# Altium PCB PCB1.PcbDoc (part 2 of 2)
Units mil, origin at the board's own origin, x right, y up, seen from the top; angles counter-clockwise.
Board outline 6000 x 4000 mil, 10 copper layers (Top Layer, Internal Plane 1, Internal Plane 5, Layer 2, Internal Plane 3, Internal Plane 4, Layer 4, Internal Plane 6, Internal Plane 2, Bottom Layer), stack 97.956 mil thick; 84 components, 218 nets, 925 pads, 573 vias.
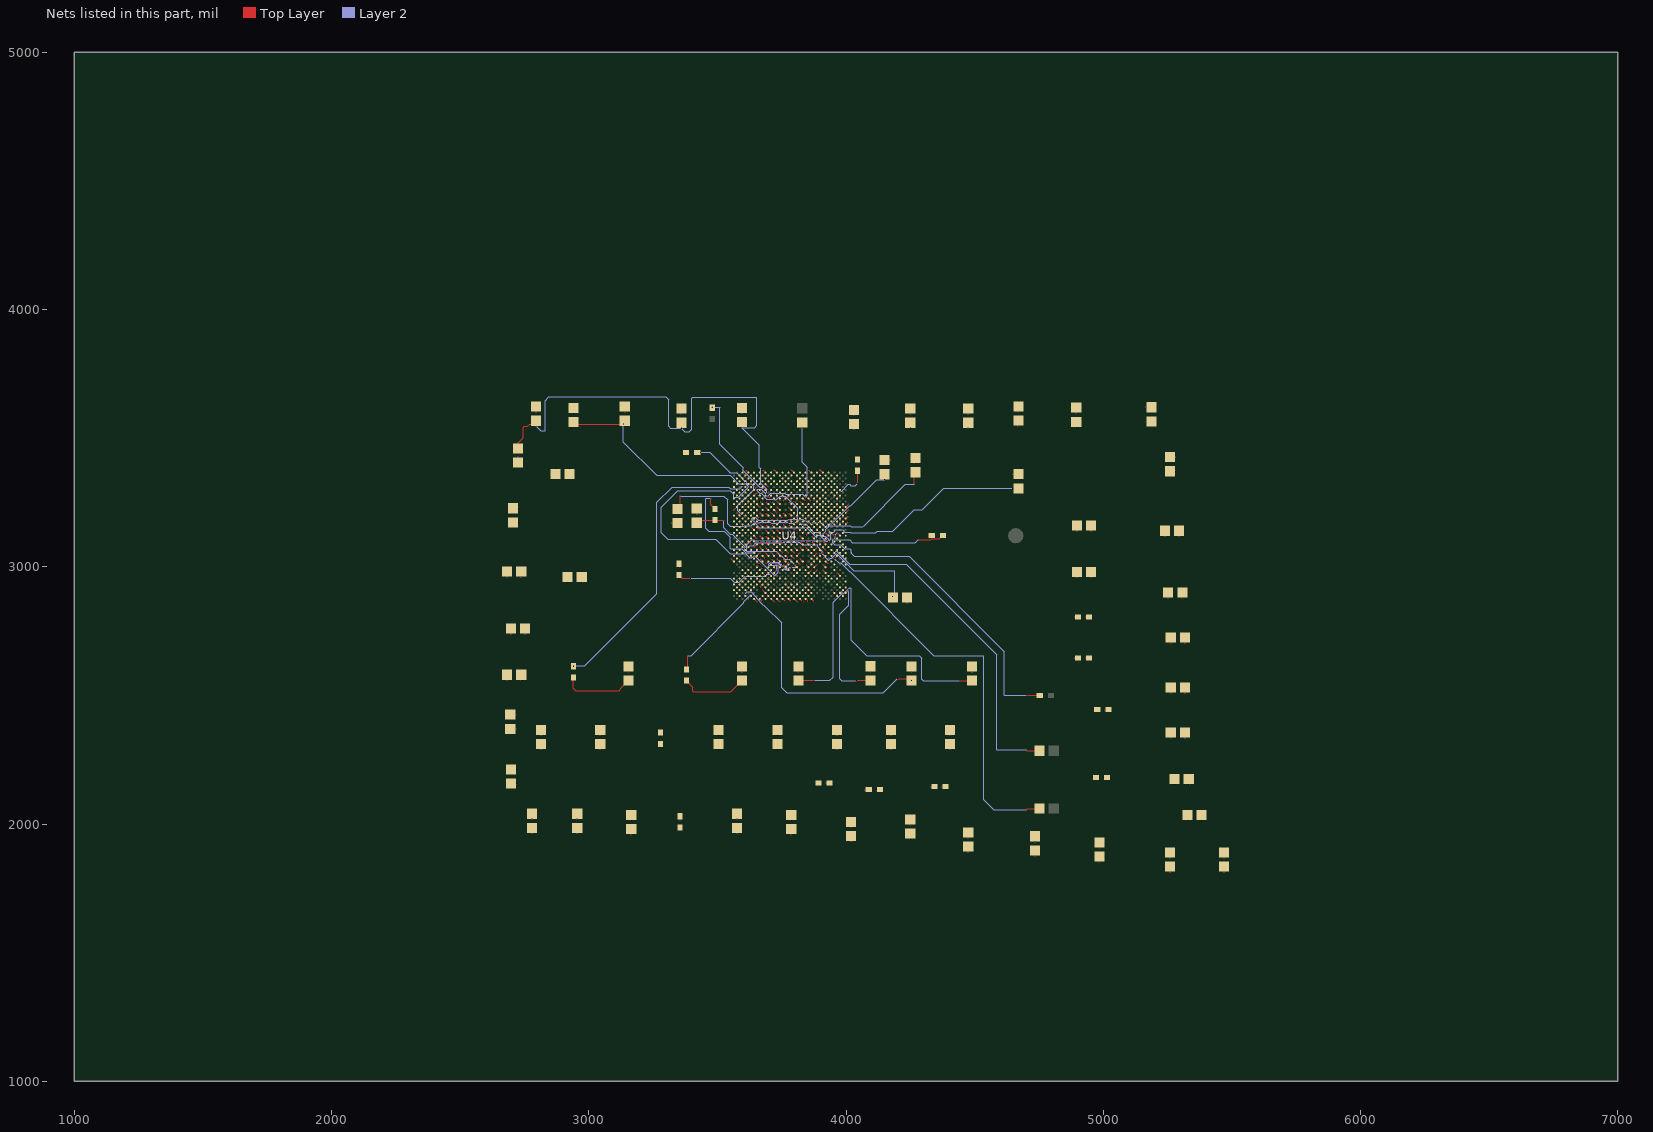
[diagram p9: the nets of this part, all layers, seen from the top]

## Via types
v1: diameter 2, hole 1, Top Layer to Bottom Layer, 573 vias

## Nets (pads, with @x,y where several pads share a name; then routed paths per layer and width w, separated by ;. In a path a pad name is that pad's centre, name@x,y a point inside that pad or via, vN(x,y) a via of type N, cw(c..) or ccw(c..) an arc to the next point about the centre after c; other vN are vias at no path point) (continued)
GND: C18.1 C19.1 C20.1 C21.1 C22.1 C23.1 C24.1 C25.1 C26.1 C27.1 C28.1 C29.1 C30.1 C31.1 C32.1 C33.1 C34.1 C35.1 C36.1 C37.1 C38.1 C39.1 C40.1 C41.1 C42.1 C43.1 C44.1 C45.1 C46.1 C47.1 C48.1 C49.1 C50.2 C51.1 C52.1 C53.1 C54.1 C55.1 C56.1 C57.1 C58.1 C59.1 C60.1 C61.1 C62.1 C63.1 C64.1 C65.1 C66.2 C67.1 C68.2 C69.2 C70.2 C71.2 C72.2 C73.2 C74.2 C75.1 C76.2 C77.2 C78.2 C79.2 R29.1 U4.A6 U4.A12 U4.A16 U4.A22 U4.A28 U4.A32 U4.AA4 U4.AA8 U4.AA24 U4.AA26 U4.AA28 U4.AA30 U4.AB13 U4.AB15 U4.AB17 U4.AB21 U4.AC4 U4.AC30 U4.AD7 U4.AD19 U4.AD21 U4.AE16 U4.AE20 U4.AF5 U4.AF9 U4.AF11 U4.AF13 U4.AF15 U4.AF17 U4.AF19 U4.AF21 U4.AF23 U4.AF25 U4.AF27 U4.AF29 U4.AG18 U4.AG20 U4.AH7 U4.AH9 U4.AH31 U4.AJ2 U4.AJ4 U4.AJ34 U4.AK7 U4.AK11 U4.AK13 U4.AK15 U4.AK17 U4.AK19 U4.AK21 U4.AK23 U4.AK29 U4.AK31 U4.AK33 U4.AL8 U4.AL30 U4.AM1 U4.AM3 U4.AM13 U4.AM15 U4.AM21 U4.AM23 U4.AM25 U4.AM29 U4.AM31 U4.AM33 U4.AN20 U4.AP9 U4.AR4 U4.AR6 U4.AR22 U4.AR24 U4.AR26 U4.AT13 U4.AT23 U4.AT27 U4.AT29 U4.AU6 U4.AU12 U4.AU22 U4.AU26 U4.AU28 U4.AU38 U4.AV5 U4.AV9 U4.AV11 U4.AV13 U4.AV15 U4.AV17 U4.AV19 U4.AV33 U4.AW2 U4.AW4 U4.AW10 U4.AW12 U4.AW14 U4.AW34 U4.AY11 U4.AY13 U4.AY19 U4.AY21 U4.AY23 U4.AY27 U4.B5 U4.BA8 U4.BA12 U4.BA18 U4.BA20 U4.BA22 U4.BA26 U4.BA28 U4.BB7 U4.BB15 U4.BB17 U4.BB19 U4.BB21 U4.BB23 U4.BB25 U4.BB27 U4.BC12 U4.BC16 U4.BC18 U4.BC20 U4.BC22 U4.BC24 U4.BC26 U4.BC28 U4.BC36 U4.BD13 U4.BD15 U4.BD17 U4.BD19 U4.BD21 U4.BD23 U4.BD25 U4.BD27 U4.BD37 U4.BE8 U4.BE10 U4.BE14 U4.BE16 U4.BE18 U4.BE20 U4.BE22 U4.BE24 U4.BE26 U4.BE28 U4.C8 U4.C18 U4.C20 U4.C32 U4.D5 U4.D7 U4.D27 U4.E12 U4.F7 U4.F19 U4.F25 U4.F27 U4.F29 U4.F37 U4.G8 U4.G10 U4.G12 U4.G14 U4.G16 U4.G18 U4.G20 U4.G24 U4.G28 U4.G30 U4.G32 U4.H35 U4.H37 U4.J16 U4.J18 U4.J32 U4.J36 U4.J38 U4.K5 U4.K9 U4.K17 U4.K21 U4.K37 U4.L4 U4.L6 U4.L8 U4.L30 U4.L32 U4.M5 U4.M7 U4.M35 U4.M37 U4.M39 U4.N2 U4.N4 U4.N8 U4.N22 U4.N24 U4.N26 U4.N28 U4.N30 U4.N32 U4.N34 U4.N36 U4.N38 U4.N40 U4.P5 U4.P9 U4.P11 U4.P13 U4.P15 U4.P17 U4.P21 U4.P35 U4.P37 U4.P39 U4.R8 U4.R22 U4.R24 U4.R26 U4.R28 U4.R30 U4.R32 U4.R34 U4.R36 U4.R38 U4.R40 U4.T3 U4.T5 U4.T17 U4.T19 U4.T35 U4.T37 U4.T39 U4.U26 U4.U28 U4.U30 U4.U32 U4.U34 U4.U36 U4.U38 U4.U40 U4.V3 U4.V11 U4.V13 U4.V15 U4.V17 U4.V19 U4.V21 U4.V23 U4.V35 U4.V37 U4.V39 U4.W4 U4.W16 U4.W22 U4.W26 U4.W28 U4.W30 U4.W32 U4.W34 U4.W36 U4.W38 U4.W40 U4.Y3 U4.Y23 | length 3581.7
  Top Layer w2: v1(2682.44,2558.31) 2682.44,2559.11 C44.1@2682.44,2580 ; v1(2682.44,2960.12) 2682.44,2960.91 C42.1@2682.44,2981.81 ; C45.1@2695,2369.88 2715.89,2369.88 v1(2716.69,2369.88) ; C46.1@2697.44,2157.44 2718.33,2157.44 v1(2719.13,2157.44) ; v1(2697.44,2738.31) 2697.44,2739.11 C43.1@2697.44,2760 ; C41.1@2705,3172.44 2725.89,3172.44 v1(2726.69,3172.44) ; C78.2@2725,3404.88 v1(2725,3426.57) ; v1(2780,1963.19) C47.1@2780,1984.88 ; v1(2795,3600.87) C79.2@2795,3622.56 ; v1(2814.41,2344.22) C37.1@2814.41,2365.91 ; C40.1@2925.12,3360 2925.12,3380.89 v1(2925.12,3381.69) ; v1(2940,3595.87) C74.2@2940,3617.56 ; v1(2955,1963.19) C48.1@2955,1984.88 ; v1(2972.56,2938.31) C65.1@2972.56,2960 ; v1(3044.41,2344.22) C36.1@3044.41,2365.91 ; v1(3140,3600.87) C75.1@3140,3622.56 ; v1(3165,1958.19) C49.1@3165,1979.88 ; v1(3279.41,2341.19) C35.1@3279.41,2355 ; v1(3323.31,3169.88) C64.1@3345,3169.88 ; v1(3350,2997.84) R29.1@3350,3011.65 ; v1(3360,3593.43) C76.2@3360,3615.12 ; v1(3420,3204.51) C70.2@3420,3226.19 ; v1(3504.41,2344.22) C34.1@3504.41,2365.91 ; v1(3553.31,3031.58) U4.AM1@3564.45,3020.44 ; v1(3564.45,3220.99) U4.N2@3575.59,3232.13 ; v1(3575.59,2018.32) C39.1@3575.59,2040 ; U4.AW2@3575.59,2942.44 v1(3575.59,2948.38) ; U4.AJ2@3575.59,3053.86 v1(3575.59,3059.8) ; v1(3575.59,3209.84) U4.T3@3586.73,3198.7 ; U4.AM3@3586.73,3020.44 v1(3586.73,3026.38) ; U4.Y3@3586.73,3154.14 v1(3586.73,3160.08) ; v1(3586.73,3170.48) U4.V3@3586.73,3176.42 ; v1(3595,3595.87) C77.2@3595,3617.56 ; U4.AW4@3597.87,2942.44 v1(3597.87,2948.38) ; U4.AR4@3597.87,2987.01 v1(3597.87,2992.95) ; U4.AJ4@3597.87,3053.86 v1(3597.87,3059.8) ; U4.AC4@3597.87,3120.71 v1(3597.87,3126.65) ; U4.AA4@3597.87,3143 v1(3597.87,3148.94) ; U4.W4@3597.87,3165.28 v1(3597.87,3171.22) ; v1(3597.87,3226.19) U4.N4@3597.87,3232.13 ; v1(3597.87,3248.47) U4.L4@3597.87,3254.41 ; U4.AV5@3609.01,2953.59 v1(3609.01,2959.53) ; U4.AF5@3609.01,3087.29 v1(3609.01,3093.23) ; v1(3609.01,3192.76) U4.T5@3609.01,3198.7 ; v1(3609.01,3215.05) U4.P5@3609.01,3220.99 ; v1(3609.01,3237.33) U4.M5@3609.01,3243.27 ; v1(3609.01,3259.62) U4.K5@3609.01,3265.56 ; v1(3609.01,3326.47) U4.D5@3609.01,3332.41 ; v1(3609.01,3348.75) U4.B5@3609.01,3354.69 ; v1(3609.02,3376.97) U4.A6@3620.16,3365.83 ; U4.AU6@3620.16,2964.73 v1(3620.16,2970.67) ; U4.AR6@3620.16,2987.01 v1(3620.16,2992.95) ; v1(3620.16,3248.47) U4.L6@3620.16,3254.41 ; U4.BB7@3631.3,2909.02 v1(3631.3,2914.96) ; U4.AK7@3631.3,3042.72 v1(3631.3,3048.66) ; U4.AH7@3631.3,3065 v1(3631.3,3070.94) ; U4.AD7@3631.3,3109.57 v1(3631.3,3115.51) ; v1(3631.3,3154.14) U4.AA8@3642.44,3143 ; v1(3631.3,3237.33) U4.M7@3631.3,3243.27 ; v1(3631.3,3304.18) U4.F7@3631.3,3310.12 ; v1(3631.3,3326.47) U4.D7@3631.3,3332.41 ; U4.BE8@3642.44,2875.59 v1(3653.58,2864.45) ; U4.BA8@3642.44,2920.16 v1(3642.44,2926.1) ; U4.AL8@3642.44,3031.58 v1(3642.44,3037.52) ; v1(3642.44,3076.15) U4.AF9@3653.58,3087.29 ; v1(3642.44,3203.91) U4.R8@3642.44,3209.85 ; v1(3642.44,3226.19) U4.N8@3642.44,3232.13 ; v1(3642.44,3248.47) U4.L8@3642.44,3254.41 ; U4.G8@3642.44,3298.98 v1(3653.58,3310.12) ; v1(3642.44,3337.61) U4.C8@3642.44,3343.55 ; U4.AV9@3653.58,2953.59 v1(3653.58,2959.53) ; U4.AP9@3653.58,2998.15 v1(3653.58,3004.09) ; U4.AH9@3653.58,3065 v1(3653.58,3070.94) ; v1(3653.58,3215.05) U4.P9@3653.58,3220.99 ; v1(3653.58,3259.62) U4.K9@3653.58,3265.56 ; U4.BE10@3664.72,2875.59 v1(3675.86,2864.45) ; v1(3664.72,2920.16) U4.AY11@3675.86,2931.3 ; U4.AW10@3664.72,2942.44 v1(3664.72,2948.38) ; v1(3664.72,3098.43) U4.AF11@3675.86,3087.29 ; v1(3664.72,3293.04) U4.G10@3664.72,3298.98 ; v1(3675.87,2909.02) U4.BC12@3687.01,2897.88 ; U4.AV11@3675.86,2953.59 v1(3675.86,2959.53) ; U4.AK11@3675.86,3042.72 v1(3687,3031.58) ; v1(3675.86,3170.48) U4.V11@3675.86,3176.42 ; v1(3675.86,3215.05) U4.P11@3675.86,3220.99 ; v1(3675.87,3376.97) U4.A12@3687.01,3365.83 ; U4.BA12@3687.01,2920.16 v1(3687.01,2926.1) ; U4.AW12@3687.01,2942.44 v1(3687.01,2948.38) ; U4.AU12@3687.01,2964.73 v1(3687.01,2970.67) ; v1(3687.01,3009.3) U4.AM13@3698.15,3020.44 ; v1(3687.01,3053.86) U4.AK13@3698.15,3042.72 ; v1(3687.01,3098.43) U4.AF13@3698.15,3087.29 ; v1(3687.01,3142.99) U4.AB13@3698.15,3131.85 ; v1(3687.01,3187.56) U4.V13@3698.15,3176.42 ; v1(3687.01,3232.13) U4.P13@3698.15,3220.99 ; v1(3687.01,3293.04) U4.G12@3687.01,3298.98 ; U4.E12@3687.01,3321.26 v1(3698.15,3310.12) ; U4.BD13@3698.15,2886.74 v1(3698.15,2892.68) ; U4.AY13@3698.15,2931.3 v1(3698.15,2937.24) ; U4.AV13@3698.15,2953.59 3699.56,2955 v1(3700,2955) ; U4.AT13@3698.15,2975.87 v1(3698.15,2981.81) ; U4.BE14@3709.29,2875.59 v1(3720.43,2864.45) ; U4.AW14@3709.29,2942.44 v1(3709.29,2948.38) ; v1(3709.29,3031.58) U4.AM15@3720.43,3020.44 ; v1(3709.29,3053.86) U4.AK15@3720.43,3042.72 ; v1(3709.29,3098.43) U4.AF15@3720.43,3087.29 ; v1(3709.29,3142.99) U4.AB15@3720.43,3131.85 ; v1(3709.29,3187.56) U4.V15@3720.43,3176.42 ; v1(3709.29,3293.04) U4.G14@3709.29,3298.98 ; U4.BD15@3720.43,2886.74 v1(3720.43,2892.68) ; U4.BB15@3720.43,2909.02 v1(3720.43,2914.96) ; U4.AV15@3720.43,2953.59 v1(3720.43,2959.53) ; U4.P15@3720.43,3220.99 v1(3731.57,3209.85) ; v1(3720.43,3376.97) U4.A16@3731.57,3365.83 ; U4.BE16@3731.57,2875.59 v1(3742.71,2864.45) ; U4.BC16@3731.57,2897.88 v1(3731.57,2903.82) ; U4.AE16@3731.57,3098.43 v1(3731.57,3104.37) ; U4.W16@3731.57,3165.28 v1(3731.57,3171.22) ; v1(3731.57,3270.76) U4.J16@3731.57,3276.7 ; v1(3731.57,3293.04) U4.G16@3731.57,3298.98 ; v1(3731.58,3053.86) U4.AK17@3742.72,3042.72 ; v1(3731.58,3142.99) U4.AB17@3742.72,3131.85 ; v1(3731.58,3187.56) U4.V17@3742.72,3176.42 ; v1(3731.58,3232.13) U4.P17@3742.72,3220.99 ; v1(3734.41,2344.22) C33.1@3734.41,2365.91 ; U4.BD17@3742.72,2886.74 v1(3742.72,2892.68) ; U4.BB17@3742.72,2909.02 v1(3742.72,2914.96) ; U4.AV17@3742.72,2953.59 v1(3742.72,2959.53) ; U4.AF17@3742.72,3087.29 v1(3753.86,3098.43) ; U4.T17@3742.72,3198.7 v1(3753.86,3187.56) ; v1(3742.72,3259.62) U4.K17@3742.72,3265.56 ; U4.BE18@3753.86,2875.59 v1(3765,2864.45) ; U4.BC18@3753.86,2897.88 v1(3753.86,2903.82) ; U4.BA18@3753.86,2920.16 v1(3753.86,2926.1) ; U4.AG18@3753.86,3076.15 v1(3753.86,3082.09) ; v1(3753.86,3120.71) U4.AD19@3765,3109.57 ; v1(3753.86,3209.84) U4.T19@3765,3198.7 ; v1(3753.86,3270.76) U4.J18@3753.86,3276.7 ; v1(3753.86,3293.04) U4.G18@3753.86,3298.98 ; v1(3753.86,3337.61) U4.C18@3753.86,3343.55 ; U4.BD19@3765,2886.74 v1(3765,2892.68) ; U4.BB19@3765,2909.02 v1(3765,2914.96) ; U4.AY19@3765,2931.3 v1(3765,2937.24) ; U4.AV19@3765,2953.59 v1(3765,2959.53) ; U4.AK19@3765,3042.72 v1(3776.14,3031.58) ; U4.AF19@3765,3087.29 v1(3765,3093.23) ; v1(3765,3170.48) U4.V19@3765,3176.42 ; v1(3765,3304.18) U4.F19@3765,3310.12 ; U4.BE20@3776.14,2875.59 v1(3787.28,2864.45) ; U4.BC20@3776.14,2897.88 v1(3776.14,2903.82) ; U4.BA20@3776.14,2920.16 v1(3776.14,2926.1) ; U4.AN20@3776.14,3009.3 v1(3776.14,3015.24) ; U4.AG20@3776.14,3076.15 v1(3776.14,3082.09) ; U4.AE20@3776.14,3098.43 v1(3776.14,3104.37) ; v1(3776.14,3120.71) U4.AD21@3787.28,3109.57 ; v1(3776.14,3142.99) U4.AB21@3787.28,3131.85 ; v1(3776.14,3187.56) U4.V21@3787.28,3176.42 ; v1(3776.14,3232.13) U4.P21@3787.28,3220.99 ; v1(3776.14,3293.04) U4.G20@3776.14,3298.98 ; v1(3776.14,3337.61) U4.C20@3776.14,3343.55 ; v1(3787.28,2013.32) C38.1@3787.28,2035 ; U4.BD21@3787.28,2886.74 v1(3787.28,2892.68) ; U4.BB21@3787.28,2909.02 v1(3787.28,2914.96) ; U4.AY21@3787.28,2931.3 v1(3787.28,2937.24) ; U4.AM21@3787.28,3020.44 v1(3787.28,3026.38) ; U4.AK21@3787.28,3042.72 v1(3798.42,3031.58) ; U4.AF21@3787.28,3087.29 v1(3787.28,3093.23) ; v1(3787.28,3259.62) U4.K21@3787.28,3265.56 ; v1(3787.28,3376.97) U4.A22@3798.42,3365.83 ; U4.BE22@3798.42,2875.59 v1(3809.56,2864.45) ; U4.BC22@3798.42,2897.88 v1(3798.42,2903.82) ; U4.BA22@3798.42,2920.16 v1(3798.42,2926.1) ; U4.AU22@3798.42,2964.73 v1(3798.42,2970.67) ; U4.AR22@3798.42,2987.01 v1(3798.42,2992.95) ; U4.W22@3798.42,3165.28 v1(3798.42,3171.22) ; v1(3798.42,3203.91) U4.R22@3798.42,3209.85 ; v1(3798.42,3226.19) U4.N22@3798.42,3232.13 ; v1(3798.43,3143) U4.Y23@3809.57,3154.14 ; U4.BD23@3809.57,2886.74 v1(3809.57,2892.68) ; U4.BB23@3809.57,2909.02 v1(3809.57,2914.96) ; U4.AY23@3809.57,2931.3 v1(3809.57,2937.24) ; U4.AT23@3809.57,2975.87 v1(3809.57,2981.81) ; U4.AM23@3809.57,3020.44 v1(3820.71,3009.3) ; U4.AK23@3809.57,3042.72 v1(3820.71,3053.86) ; U4.AF23@3809.57,3087.29 v1(3809.57,3093.23) ; v1(3809.57,3170.48) U4.V23@3809.57,3176.42 ; U4.BE24@3820.71,2875.59 v1(3831.85,2864.45) ; U4.BC24@3820.71,2897.88 v1(3820.71,2903.82) ; U4.AR24@3820.71,2987.01 v1(3820.71,2992.95) ; v1(3820.71,3031.58) U4.AM25@3831.85,3020.44 ; v1(3820.71,3098.43) U4.AF25@3831.85,3087.29 ; U4.AA24@3820.71,3143 v1(3820.71,3148.94) ; v1(3820.71,3203.91) U4.R24@3820.71,3209.85 ; v1(3820.71,3226.19) U4.N24@3820.71,3232.13 ; v1(3820.71,3293.04) U4.G24@3820.71,3298.98 ; U4.BD25@3831.85,2886.74 v1(3831.85,2892.68) ; U4.BB25@3831.85,2909.02 v1(3831.85,2914.96) ; v1(3831.85,3304.18) U4.F25@3831.85,3310.12 ; U4.BE26@3842.99,2875.59 v1(3854.13,2864.45) ; U4.BC26@3842.99,2897.88 v1(3842.99,2903.82) ; U4.BA26@3842.99,2920.16 v1(3842.99,2926.1) ; U4.AU26@3842.99,2964.73 v1(3842.99,2970.67) ; U4.AR26@3842.99,2987.01 v1(3842.99,2992.95) ; v1(3842.99,3098.43) U4.AF27@3854.13,3087.29 ; U4.AA26@3842.99,3143 v1(3842.99,3148.94) ; U4.W26@3842.99,3165.28 v1(3842.99,3171.22) ; v1(3842.99,3181.62) U4.U26@3842.99,3187.56 ; v1(3842.99,3203.91) U4.R26@3842.99,3209.85 ; v1(3842.99,3226.19) U4.N26@3842.99,3232.13 ; U4.BD27@3854.13,2886.74 v1(3854.13,2892.68) ; U4.BB27@3854.13,2909.02 v1(3854.13,2914.96) ; U4.AY27@3854.13,2931.3 v1(3854.13,2937.24) ; U4.AT27@3854.13,2975.87 v1(3865.27,2987.01) ; v1(3854.13,3304.18) U4.F27@3854.13,3310.12 ; v1(3854.13,3326.47) U4.D27@3854.13,3332.41 ; v1(3854.13,3376.97) U4.A28@3865.27,3365.83 ; U4.BE28@3865.27,2875.59 v1(3876.41,2864.45) ; U4.BC28@3865.27,2897.88 v1(3865.27,2903.82) ; U4.BA28@3865.27,2920.16 v1(3865.27,2926.1) ; U4.AU28@3865.27,2964.73 v1(3865.27,2970.67) ; U4.AA28@3865.27,3143 v1(3865.27,3148.94) ; U4.W28@3865.27,3165.28 v1(3865.27,3171.22) ; v1(3865.27,3181.62) U4.U28@3865.27,3187.56 ; v1(3865.27,3203.91) U4.R28@3865.27,3209.85 ; v1(3865.27,3226.19) U4.N28@3865.27,3232.13 ; v1(3865.27,3293.04) U4.G28@3865.27,3298.98 ; v1(3865.28,3098.43) U4.AF29@3876.42,3087.29 ; U4.AT29@3876.42,2975.87 v1(3887.56,2987.01) ; U4.AM29@3876.42,3020.44 v1(3876.42,3026.38) ; U4.AK29@3876.42,3042.72 v1(3887.56,3053.86) ; v1(3876.42,3304.18) U4.F29@3876.42,3310.12 ; U4.AL30@3887.56,3031.58 v1(3887.56,3037.52) ; U4.AC30@3887.56,3120.71 v1(3887.56,3126.65) ; U4.AA30@3887.56,3143 v1(3887.56,3148.94) ; U4.W30@3887.56,3165.28 v1(3887.56,3171.22) ; v1(3887.56,3181.62) U4.U30@3887.56,3187.56 ; v1(3887.56,3203.91) U4.R30@3887.56,3209.85 ; v1(3887.56,3226.19) U4.N30@3887.56,3232.13 ; v1(3887.56,3248.47) U4.L30@3887.56,3254.41 ; v1(3887.56,3293.04) U4.G30@3887.56,3298.98 ; U4.AM31@3898.7,3020.44 v1(3898.7,3026.38) ; U4.AK31@3898.7,3042.72 v1(3898.7,3048.66) ; U4.AH31@3898.7,3065 v1(3909.84,3053.86) ; v1(3898.7,3376.97) U4.A32@3909.84,3365.83 ; v1(3909.84,3031.58) U4.AK33@3920.98,3042.72 ; U4.W32@3909.84,3165.28 v1(3909.84,3171.22) ; v1(3909.84,3181.62) U4.U32@3909.84,3187.56 ; v1(3909.84,3203.91) U4.R32@3909.84,3209.85 ; v1(3909.84,3226.19) U4.N32@3909.84,3232.13 ; v1(3909.84,3248.47) U4.L32@3909.84,3254.41 ; v1(3909.84,3270.76) U4.J32@3909.84,3276.7 ; v1(3909.84,3293.04) U4.G32@3909.84,3298.98 ; v1(3909.84,3337.61) U4.C32@3909.84,3343.55 ; U4.AV33@3920.98,2953.59 v1(3920.98,2959.53) ; U4.AM33@3920.98,3020.44 v1(3932.12,3009.3) ; U4.AW34@3932.12,2942.44 v1(3932.12,2948.38) ; U4.AJ34@3932.12,3053.86 v1(3932.12,3059.8) ; U4.W34@3932.12,3165.28 v1(3932.12,3171.22) ; v1(3932.12,3181.62) U4.U34@3932.12,3187.56 ; v1(3932.12,3203.91) U4.R34@3932.12,3209.85 ; v1(3932.12,3226.19) U4.N34@3932.12,3232.13 ; v1(3943.27,3170.48) U4.V35@3943.27,3176.42 ; v1(3943.27,3192.76) U4.T35@3943.27,3198.7 ; v1(3943.27,3215.05) U4.P35@3943.27,3220.99 ; v1(3943.27,3237.33) U4.M35@3943.27,3243.27 ; v1(3943.27,3281.9) U4.H35@3943.27,3287.84 ; U4.BC36@3954.41,2897.88 v1(3954.41,2903.82) ; U4.W36@3954.41,3165.28 v1(3954.41,3171.22) ; v1(3954.41,3181.62) U4.U36@3954.41,3187.56 ; v1(3954.41,3203.91) U4.R36@3954.41,3209.85 ; v1(3954.41,3226.19) U4.N36@3954.41,3232.13 ; v1(3954.41,3270.76) U4.J36@3954.41,3276.7 ; v1(3964.41,2344.22) C32.1@3964.41,2365.91 ; U4.BD37@3965.55,2886.74 v1(3965.55,2892.68) ; v1(3965.55,2975.87) U4.AU38@3976.69,2964.73 ; v1(3965.55,3170.48) U4.V37@3965.55,3176.42 ; v1(3965.55,3192.76) U4.T37@3965.55,3198.7 ; v1(3965.55,3215.05) U4.P37@3965.55,3220.99 ; v1(3965.55,3237.33) U4.M37@3965.55,3243.27 ; v1(3965.55,3259.62) U4.K37@3965.55,3265.56 ; v1(3965.55,3281.9) U4.H37@3965.55,3287.84 ; v1(3965.55,3304.18) U4.F37@3965.55,3310.12 ; U4.W38@3976.69,3165.28 v1(3976.69,3171.22) ; v1(3976.69,3181.62) U4.U38@3976.69,3187.56 ; v1(3976.69,3203.91) U4.R38@3976.69,3209.85 ; v1(3976.69,3226.19) U4.N38@3976.69,3232.13 ; v1(3976.69,3270.76) U4.J38@3976.69,3276.7 ; v1(3987.83,3170.48) U4.V39@3987.83,3176.42 ; v1(3987.83,3192.76) U4.T39@3987.83,3198.7 ; v1(3987.83,3215.05) U4.P39@3987.83,3220.99 ; v1(3987.83,3237.33) U4.M39@3987.83,3243.27 ; U4.W40@3998.98,3165.28 v1(4010.12,3176.42) ; U4.U40@3998.98,3187.56 v1(4010.12,3198.7) ; U4.R40@3998.98,3209.85 v1(4010.12,3220.99) ; U4.N40@3998.98,3232.13 v1(4010.12,3243.27) ; v1(4020,1986.63) C57.1@4020,2008.32 ; v1(4030.98,3588.43) C71.2@4030.98,3610.12 ; v1(4117.84,2133.31) 4118.63,2133.31 C28.1@4131.65,2133.31 ; C62.1@4150,3415 v1(4171.69,3415) ; v1(4174.41,2344.22) C31.1@4174.41,2365.91 ; v1(4237.56,2858.31) C63.1@4237.56,2880 ; v1(4250,1995.87) C56.1@4250,2017.56 ; v1(4250,3593.43) C72.2@4250,3615.12 ; v1(4270,3400.87) C69.2@4270,3422.56 ; v1(4372.84,2145) C29.1@4386.65,2145 ; v1(4404.41,2344.22) C30.1@4404.41,2365.91 ; v1(4475,1945.87) C55.1@4475,1967.56 ; v1(4475,3593.43) C73.2@4475,3615.12 ; v1(4648.31,3360) C66.2@4670,3360 ; v1(4670,3601.75) C67.1@4670,3623.43 ; v1(4735,1930.87) C54.1@4735,1952.56 ; v1(4887.88,2645) C25.1@4901.69,2645 ; v1(4888.06,2805) C24.1@4901.87,2805 ; v1(4895,3596.75) C68.2@4895,3618.43 ; v1(4897.44,2958.31) 4897.44,2959.11 C23.1@4897.44,2980 ; v1(4897.44,3138.39) 4897.44,3139.18 C22.1@4897.44,3160.08 ; v1(4957.88,2180) C27.1@4971.69,2180 ; v1(4962.88,2445) C26.1@4976.69,2445 ; v1(4985,1906.75) C53.1@4985,1928.43 ; v1(5166.62,3620) 5167.41,3620 C58.1@5188.31,3620 ; v1(5239.88,3118.31) 5239.88,3119.11 C19.1@5239.88,3140 ; v1(5252.44,2878.31) 5252.44,2879.11 C20.1@5252.44,2900 ; v1(5260,1867.91) C52.1@5260,1889.59 ; C18.1@5260,3371.45 5280.89,3371.45 v1(5281.69,3371.45) ; v1(5262.44,2333.31) 5262.44,2334.11 C60.1@5262.44,2355 ; v1(5262.44,2508.31) 5262.44,2509.11 C59.1@5262.44,2530 ; v1(5262.44,2703.31) 5262.44,2704.11 C21.1@5262.44,2725 ; v1(5277.44,2153.31) C61.1@5277.44,2175 ; v1(5327.44,2013.31) C50.2@5327.44,2035 ; v1(5470,1867.91) C51.1@5470,1889.59
NetC16_2: C16.2 U4.AK37 | length 1548.4
  Top Layer w2: v1(3954.41,3031.58) U4.AK37@3965.55,3042.72
  Top Layer w3.5: v1(4700,2055) 4705,2060 C16.2@4752.44,2060
  Layer 2 w2: v1(3954.41,3031.58) 3955,3031.58 3971.34,3015.24 3980,3015.24 4015.24,2980 4015.91,2980
  Layer 2 w3.5: 4015.91,2980 4340.91,2655 4535,2655 4535,2095 4575,2055 v1(4700,2055)
NetC17_2: C17.2 U4.AJ36 | length 1341.6
  Top Layer w2: U4.AJ36@3954.41,3053.86 v1(3954.41,3059.8)
  Top Layer w3.5: v1(4700,2288.31) 4703.31,2285 C17.2@4752.44,2285
  Layer 2 w2: v1(3954.41,3059.8) 3964.45,3059.8 4014.25,3010
  Layer 2 w3.5: 4014.25,3010 4235,3010 4586.69,2658.31 4586.69,2288.31 v1(4700,2288.31)
NetC62_2: C62.2 U4.V9 U4.Y33 | length 638.7
  Top Layer w2: v1(3653.58,3170.48) U4.V9@3653.58,3176.42 ; U4.Y33@3920.98,3154.14 v1(3920.98,3160.08) ; v1(4150,3338.2) C62.2@4150,3359.88
  Layer 2 w2: v1(3653.58,3170.48) 3663.84,3170.48 3666.84,3173.48 3705.33,3173.48 3710.6,3168.22 3735.79,3168.22 3741.05,3173.48 3772.18,3173.48 3777.45,3168.22 3799.66,3168.22 3804.93,3173.48 3810.81,3173.48 3815.14,3177.81 3815.14,3180.3 3819.47,3184.62 3831.74,3184.62 3837.74,3178.62 3844.36,3178.62 3849.5,3173.48 3855.37,3173.48 3860.64,3168.22 3866.52,3168.22 3871.79,3173.48 3877.66,3173.48 3882.93,3168.22 3888.8,3168.22 3894.07,3173.48 3900.82,3173.48 3914.23,3160.08 v1(3920.98,3160.08) 3931.81,3160.08 3939.22,3167.48 3944.51,3167.48 4014.36,3237.33
  Layer 2 w3.5: 4014.36,3237.33 4019.06,3237.33 4119.92,3338.2 v1(4150,3338.2)
NetC63_2: C63.2 U4.AG6 | length 761.7
  Top Layer w2: U4.AG6@3620.16,3076.15 v1(3620.16,3082.09)
  Layer 2 w2: v1(3620.16,3082.09) 3638.86,3082.09 3650,3093.23 3752.9,3093.23 3755.9,3096.23 3818.67,3096.23 3829.81,3085.09 3889.76,3085.09 3889.76,3078.18 3906.84,3061.1 3906.84,3050.28 3931.29,3025.83 3932.95,3025.83 3939.53,3032.41 3944.1,3032.41 3961.69,3050 3965,3050 4030,2985
  Layer 2 w3.5: 4030,2985 4190,2985 4190,2893.63 v1(4181.37,2885)
NetC64_2: C64.2 U4.W8 | length 456.7
  Top Layer w2: C64.2@3345,3225 C64.2@3355,3235 ; U4.W8@3642.44,3165.28 v1(3642.44,3171.22)
  Top Layer w3.5: C64.2@3355,3235 v1(3355,3275)
  Layer 2 w2: 3550,3157.08 3601.39,3157.08 3604.25,3159.93 3631.16,3159.93 v1(3642.44,3171.22)
  Layer 2 w3.5: v1(3355,3275) 3525,3275 3540,3260 3540,3167.08 3550,3157.08
NetC69_1: C69.1 U4.AC32 | length 498.4
  Top Layer w2: U4.AC32@3909.84,3120.71 v1(3909.84,3126.65) ; C69.1@4265,3362.44 C69.1@4270,3367.44
  Top Layer w3.5: v1(4265,3323.47) C69.1@4265,3362.44
  Layer 2 w2: v1(3909.84,3126.65) 3920.98,3137.79 3920.98,3145 3936.06,3160.08 4016.1,3160.08 ; 4263.83,3320 4265,3321.17
  Layer 2 w3.5: 4016.1,3160.08 4021.17,3155 4065,3155 4070.08,3160.08 4230,3320 4263.83,3320 ; 4265,3321.17 v1(4265,3323.47)
NetC74_1: C74.1 C75.2 U4.AP17 U4.AP19 U4.AT15 | length 2077
  Top Layer w2: C74.1@2940,3562.44 C74.1@2947.44,3555 ; v1(3135,3555) 3140,3560 C75.2@3140,3567.44 ; U4.AT15@3720.43,2975.87 v1(3731.57,2987.01) ; v1(3731.58,3009.29) U4.AP17@3742.72,2998.15 ; v1(3753.86,3009.29) U4.AP19@3765,2998.15
  Top Layer w3.5: C74.1@2947.44,3555 v1(3135,3555)
  Layer 2 w2: 3550,3050 3610,3050 3625,3035 3634.33,3035 3642.9,3043.57 3644.56,3043.57 3722.29,2965.83 3723.95,2965.83 3736.01,2977.88 3736.01,3004.86 v1(3731.58,3009.29) ; 3550,3355 3581.53,3323.47 3609.84,3323.47 3620,3313.31 3620,3310 3580.76,3270.76 3564.24,3270.76 3564.24,3281.58 3550.82,3295 ; v1(3731.57,2987.01) v1(3731.58,3009.29) 3727.29,3005 3701.17,3005 3700,3006.17 3700,3010.19 3708.05,3018.24 3736.01,3018.24 3744.94,3009.3 v1(3753.86,3009.29)
  Layer 2 w3.5: v1(3135,3555) 3135,3485 3265,3355 3550,3355 ; 3550,3050 3493.69,3106.31 3306.24,3106.31 3280.9,3131.65 3280.9,3230.9 3343.04,3293.04 3345,3295 3550.82,3295
NetL1_1: U4.AB7
NetR13_2: R13.2 R14.1 | length 266.4
  Top Layer w2: 3125,2525 3125,2527.44
  Top Layer w3.5: 2940,2557.94 2940,2528.31 2950,2518.31 3118.31,2518.31 3125,2525 ; 3125,2527.44 R13.2@3155,2557.44
NetR14_2: R14.2 U4.E4 | length 1167.7
  Top Layer w2: v1(3597.87,3315.32) U4.E4@3597.87,3321.26
  Layer 2 w2: v1(2940,2613.31) 2940,2613.83 2941.17,2615 ; 3550.82,3304.18 3586.73,3304.18 v1(3597.87,3315.32)
  Layer 2 w3.5: 2941.17,2615 2985,2615 3265,2895 3265,3250 3325,3310 3545,3310 3550.82,3304.18
NetR15_2: R15.2 R16.1 | length 260.9
  Top Layer w2: R16.1@3380,2555.97 R16.1@3380,2557.94 R16.1@3380.5,2557.44 ; 3405,2516.17 3406.17,2515
  Top Layer w3.5: R16.1@3380,2555.97 3405,2530.97 3405,2516.17 ; 3406.17,2515 3552.56,2515 R15.2@3595,2557.44
NetR16_2: R16.2 U4.BD7 | length 409.1
  Top Layer w2: U4.BD7@3631.3,2886.74 v1(3631.3,2892.68)
  Top Layer w3.5: R16.2@3380,2601.25 3385,2606.25 v1(3385,2655)
  Layer 2 w2: 3603.04,2860 3603.04,2864.42 v1(3631.3,2892.68)
  Layer 2 w3.5: v1(3385,2655) 3398.04,2655 3603.04,2860
NetR17_2: R17.2 U4.BC38 | length 501.5
  Top Layer w2: R17.2@3815,2557.44 R17.2@3815.87,2558.31 ; U4.BC38@3976.69,2897.88 v1(3976.69,2903.82)
  Top Layer w3.5: R17.2@3815.87,2558.31 v1(3875,2558.31)
  Layer 2 w2: 3950,2862.68 3985,2897.68 3985,2902.64 3983.83,2903.82 v1(3976.69,2903.82)
  Layer 2 w3.5: v1(3875,2558.31) 3937.27,2558.31 3950,2571.04 3950,2862.68
NetR18_2: R18.2 U4.BC40 | length 497.8
  Top Layer w2: U4.BC40@3998.98,2897.88 v1(4010.12,2909.02) ; v1(4040,2557.44) 4040.75,2558.19
  Top Layer w3.5: 4040.75,2558.19 R18.2@4095,2558.19
  Layer 2 w3.5: v1(4010.12,2909.02) 4010.12,2850.12 3975,2815 3975,2565 3982.56,2557.44 v1(4040,2557.44)
NetR19_2: R19.2 U4.BD5 | length 996.5
  Top Layer w2: U4.BD5@3609.01,2886.74 v1(3609.01,2892.68)
  Top Layer w3.5: v1(4200,2565) 4247.44,2565 v1(4255,2557.44)
  Layer 2 w2: v1(3609.01,2892.68) 3615,2903.82 3631.3,2903.82 3670,2858.31
  Layer 2 w3.5: 3670,2858.31 3687,2845 3750,2782 3750,2530 3770,2510 4145,2510 v1(4200,2565)
NetR20_2: R20.2 U4.BD39 | length 833.9
  Top Layer w2: U4.BD39@3987.83,2886.74 v1(3987.83,2892.68)
  Top Layer w3.5: v1(4440,2557.44) R20.2@4490,2557.44
  Layer 2 w2: v1(3987.83,2892.68) 4014.25,2919.09 4015.91,2919.09
  Layer 2 w3.5: 4015.91,2919.09 4020,2915 4020,2715 4080,2655 4285,2655 4295,2645 4295,2563.31 4300.87,2557.44 v1(4440,2557.44)
NetR21_1: R21.1 U4.AE36 | length 444.1
  Top Layer w2: U4.AE36@3954.41,3098.43 v1(3954.41,3104.37) ; v1(4280,3104.37) 4328.84,3104.37 4333.35,3108.87 4362.84,3108.87 4374.69,3120.71 R21.1@4376.65,3120.71
  Layer 2 w2: v1(3954.41,3104.37) 3954.6,3104.17 4014.25,3104.17
  Layer 2 w3.5: 4014.25,3104.17 4025.11,3093.31 4268.95,3093.31 v1(4280,3104.37)
NetR21_2: R21.2
NetR22_1: R22.1 U4.R4 | length 431.7
  Top Layer w2: v1(3597.87,3200) U4.R4@3597.87,3209.85
  Top Layer w3.5: R22.1@3421.65,3445 v1(3435.47,3445)
  Layer 2 w2: 3547.14,3365 3574.73,3365 3616.25,3323.47 3631.04,3323.47 3641.2,3313.31 3641.2,3300.35 3580,3239.16 3580,3217.87 v1(3597.87,3200)
  Layer 2 w3.5: v1(3435.47,3445) 3470,3445 3547.14,3367.86 3547.14,3365
NetR22_2: R22.2
NetR24_1: R24.1
NetR25_1: R25.1
NetR26_2: R26.2 U4.F11 | length 432.7
  Top Layer w2: U4.F11@3675.86,3310.12 3675.86,3304.86 3679.28,3301.44 v1(3679.28,3300.53)
  Layer 2 w2: 3508.83,3620 3510,3618.83 ; 3601.39,3385 3601.39,3373.61 3665,3310 3669.81,3310 v1(3679.28,3300.53)
  Layer 2 w3.5: v1(3480,3620) 3508.83,3620 ; 3510,3618.83 3510,3476.39 3601.39,3385
NetR27_1: R27.1 U4.G38 | length 140
  Top Layer w2: v1(3976.69,3293.04) U4.G38@3976.69,3298.98
  Top Layer w3.5: v1(4045,3324.45) R27.1@4045,3373.35
  Layer 2 w2: v1(3976.69,3293.04) 3982.72,3293.04 4009.68,3320 4014.38,3320
  Layer 2 w3.5: 4014.38,3320 4019.06,3315.32 4035.87,3315.32 v1(4045,3324.45)
NetR27_2: R27.2
NetR28_1: R28.1 U4.AJ8 | length 446.4
  Top Layer w2: R28.1@3490,3225 R28.1@3490,3226.97 ; U4.AJ8@3642.44,3053.86 v1(3648.38,3053.86)
  Top Layer w3.5: v1(3475,3265.56) 3475,3241.97 R28.1@3490,3226.97
  Layer 2 w2: 3455,3264.39 3456.17,3265.56 v1(3475,3265.56) ; 3550,3072.11 3551.17,3070.94 3593.86,3070.94 3610.94,3053.86 v1(3648.38,3053.86)
  Layer 2 w3.5: 3455,3264.39 3455,3148.94 3466.15,3137.79 3527.01,3137.79 3550,3114.8 3550,3072.11
NetR29_2: R29.2 U4.AU14 | length 390.8
  Top Layer w2: R29.2@3350,2968.35 3350,2966.38 R29.2@3358.84,2957.54 ; U4.AU14@3709.29,2964.73 v1(3709.29,2970.67)
  Top Layer w3.5: R29.2@3358.84,2957.54 3360.81,2957.54 3363.35,2955 v1(3395,2955)
  Layer 2 w2: 3550,2955 3565,2940 3585,2940 3607.83,2962.83 3683.42,2962.83 3691.25,2970.67 v1(3709.29,2970.67)
  Layer 2 w3.5: v1(3395,2955) 3550,2955
NetU4_A4: U4.A4
NetU4_A8: U4.A8
NetU4_A10: U4.A10
NetU4_A14: U4.A14
NetU4_A18: U4.A18
NetU4_A20: U4.A20
NetU4_A24: U4.A24
NetU4_A26: U4.A26
NetU4_A30: U4.A30
NetU4_A34: U4.A34
NetU4_AA2: U4.AA2
NetU4_AA6: U4.AA6
NetU4_AB1: U4.AB1
NetU4_AB3: U4.AB3
NetU4_AB5: U4.AB5
NetU4_AB39: U4.AB39
NetU4_AC2: U4.AC2
NetU4_AC40: U4.AC40
NetU4_AD37: U4.AD37
NetU4_AE2: U4.AE2
NetU4_AE4: U4.AE4
NetU4_AE38: U4.AE38
NetU4_AF1: U4.AF1
NetU4_AF3: U4.AF3
NetU4_AF35: U4.AF35
NetU4_AF39: U4.AF39
NetU4_AG2: U4.AG2
NetU4_AG4: U4.AG4
NetU4_AG34: U4.AG34
NetU4_AG38: U4.AG38
NetU4_AG40: U4.AG40
NetU4_AH1: U4.AH1
NetU4_AH3: U4.AH3
NetU4_AH35: U4.AH35
NetU4_AH37: U4.AH37
NetU4_AH39: U4.AH39
NetU4_AJ38: U4.AJ38
NetU4_AJ40: U4.AJ40
NetU4_AK1: U4.AK1
NetU4_AK35: U4.AK35
NetU4_AK39: U4.AK39
NetU4_AL2: U4.AL2
NetU4_AL40: U4.AL40
NetU4_AM35: U4.AM35
NetU4_AM39: U4.AM39
NetU4_AN36: U4.AN36
NetU4_AN40: U4.AN40
NetU4_AP13: U4.AP13
NetU4_AP15: U4.AP15
NetU4_AR12: U4.AR12
NetU4_AR14: U4.AR14
NetU4_AR36: U4.AR36
NetU4_AT5: U4.AT5
NetU4_AT9: U4.AT9
NetU4_AU4: U4.AU4
NetU4_AV3: U4.AV3
NetU4_AV7: U4.AV7
NetU4_AV35: U4.AV35
NetU4_AV37: U4.AV37
NetU4_AW6: U4.AW6
NetU4_AW8: U4.AW8
NetU4_AW40: U4.AW40
NetU4_AY1: U4.AY1
NetU4_AY3: U4.AY3
NetU4_AY5: U4.AY5
NetU4_AY7: U4.AY7
NetU4_AY9: U4.AY9
NetU4_AY37: U4.AY37
NetU4_B3: U4.B3
NetU4_B7: U4.B7
NetU4_B9: U4.B9
NetU4_B11: U4.B11
NetU4_B13: U4.B13
NetU4_B15: U4.B15
NetU4_B17: U4.B17
NetU4_B19: U4.B19
NetU4_B21: U4.B21
NetU4_B23: U4.B23
NetU4_B25: U4.B25
NetU4_B29: U4.B29
NetU4_B31: U4.B31
NetU4_B33: U4.B33
NetU4_B35: U4.B35
NetU4_B37: U4.B37
NetU4_BA2: U4.BA2
NetU4_BA4: U4.BA4
NetU4_BA6: U4.BA6
NetU4_BA38: U4.BA38
NetU4_BA40: U4.BA40
NetU4_BB1: U4.BB1
NetU4_BB3: U4.BB3
NetU4_BB5: U4.BB5
NetU4_BB13: U4.BB13
NetU4_BB39: U4.BB39
NetU4_BC2: U4.BC2
NetU4_BC14: U4.BC14
NetU4_BD3: U4.BD3
NetU4_BD11: U4.BD11
NetU4_BE12: U4.BE12
NetU4_C2: U4.C2
NetU4_C4: U4.C4
NetU4_C6: U4.C6
NetU4_C10: U4.C10
NetU4_C12: U4.C12
NetU4_C14: U4.C14
NetU4_C24: U4.C24
NetU4_C26: U4.C26
NetU4_C28: U4.C28
NetU4_C34: U4.C34
NetU4_C36: U4.C36
NetU4_D1: U4.D1
NetU4_D3: U4.D3
NetU4_D9: U4.D9
NetU4_D11: U4.D11
NetU4_D13: U4.D13
NetU4_D15: U4.D15
NetU4_D17: U4.D17
NetU4_D19: U4.D19
NetU4_D21: U4.D21
NetU4_D23: U4.D23
NetU4_D25: U4.D25
NetU4_D29: U4.D29
NetU4_D31: U4.D31
NetU4_D35: U4.D35
NetU4_E2: U4.E2
NetU4_E6: U4.E6
NetU4_E8: U4.E8
NetU4_E10: U4.E10
NetU4_E14: U4.E14
NetU4_E16: U4.E16
NetU4_E18: U4.E18
NetU4_E20: U4.E20
NetU4_E22: U4.E22
NetU4_E24: U4.E24
NetU4_E26: U4.E26
NetU4_E28: U4.E28
NetU4_E30: U4.E30
NetU4_E32: U4.E32
NetU4_E34: U4.E34
NetU4_F1: U4.F1
NetU4_F2: 
NetU4_F5: U4.F5
NetU4_F23: U4.F23
NetU4_F33: U4.F33
NetU4_G2: U4.G2
NetU4_G4: U4.G4
NetU4_G6: U4.G6
NetU4_H1: U4.H1
NetU4_H3: U4.H3
NetU4_H5: U4.H5
NetU4_H33: U4.H33
NetU4_J2: U4.J2
NetU4_J4: U4.J4
NetU4_J6: U4.J6
NetU4_K1: U4.K1
NetU4_K3: U4.K3
NetU4_K7: U4.K7
NetU4_L2: U4.L2
NetU4_M1: U4.M1
NetU4_M3: U4.M3
NetU4_N6: U4.N6
NetU4_P3: U4.P3
NetU4_P7: U4.P7
NetU4_R6: U4.R6
NetU4_T1: U4.T1
NetU4_T7: U4.T7
NetU4_U2: U4.U2
NetU4_U4: U4.U4
NetU4_U6: U4.U6
NetU4_V1: U4.V1
NetU4_V5: U4.V5
NetU4_W2: U4.W2
NetU4_W6: U4.W6
NetU4_Y1: U4.Y1
NetU4_Y5: U4.Y5
PS_HOLD: U4.E36
RESIN_N: U4.F35
RESOUT_N: U4.AV1
SLEEP_CLK: U4.G36
USB2_HS_TXRTUNE: R23.2 U4.AC38 | length 1217.7
  Top Layer w2: v1(3965.55,3131.85) U4.AC38@3976.69,3120.71
  Top Layer w3.5: v1(4703.31,2500) R23.2@4753.35,2500
  Layer 2 w2: v1(3965.55,3131.85) 3957.41,3123.71 3957.41,3113.58 3948.83,3105 3948.83,3093.23 3957.05,3085 3980,3085 3995,3070 4014.25,3070
  Layer 2 w3.5: 4014.25,3070 4020,3064.25 4020,3056.17 4021.17,3055 4021.17,3051.78 4032.95,3040 4245,3040 4615,2670 4615,2500 v1(4703.31,2500)
VREF_LPDDR: C15.2 U4.H21 U4.J12 U4.J26 | length 478.4
  Top Layer w2: U4.J12@3687.01,3276.7 v1(3692.95,3276.7) ; v1(3787.28,3281.9) U4.H21@3787.28,3287.84 ; v1(3830,3539.19) C15.2@3830,3560.87 ; v1(3842.99,3270.76) U4.J26@3842.99,3276.7
  Layer 2 w2: v1(3692.95,3276.7) 3698.42,3276.7 3706.62,3284.9 3762.88,3284.9 3765.88,3281.9 v1(3787.28,3281.9) 3831.85,3281.9 v1(3842.99,3270.76) 3850,3277.77 3850,3386.89
  Layer 2 w3.5: v1(3830,3539.19) 3830,3406.89 3850,3386.89
VREG_L2: C58.2 C59.2 C60.2 C61.2 C67.2 C68.1 U4.AB9 U4.AC8 U4.AE6 U4.AE8 U4.J10 U4.J14 U4.J20 U4.J22 U4.J24 U4.J30 U4.K11 U4.K15 U4.K19 U4.K23 | length 252.5
  Top Layer w2: U4.AE6@3620.16,3098.43 v1(3631.3,3087.29) ; U4.AE8@3642.44,3098.43 v1(3642.44,3104.37) ; U4.AC8@3642.44,3120.71 v1(3653.58,3109.57) ; U4.AB9@3653.58,3131.85 v1(3653.58,3137.79) ; v1(3664.72,3270.76) U4.J10@3664.72,3276.7 ; v1(3675.86,3259.62) U4.K11@3675.86,3265.56 ; v1(3698.15,3265.56) U4.J14@3709.29,3276.7 ; v1(3720.43,3259.62) U4.K15@3720.43,3265.56 ; v1(3753.86,3254.42) U4.K19@3765,3265.56 ; v1(3776.14,3270.76) U4.J20@3776.14,3276.7 ; v1(3798.42,3270.76) U4.J22@3798.42,3276.7 ; v1(3809.57,3259.62) U4.K23@3809.57,3265.56 ; v1(3820.71,3270.76) U4.J24@3820.71,3276.7 ; v1(3887.56,3270.76) U4.J30@3887.56,3276.7 ; v1(4670,3546.63) C67.2@4670,3568.31 ; v1(4895,3541.63) C68.1@4895,3563.31 ; v1(5166.62,3564.88) 5167.41,3564.88 C58.2@5188.31,3564.88 ; v1(5317.56,2333.31) 5317.56,2334.11 C60.2@5317.56,2355 ; v1(5317.56,2508.31) 5317.56,2509.11 C59.2@5317.56,2530 ; v1(5332.56,2153.31) C61.2@5332.56,2175
VREG_L3: C18.2 C19.2 C20.2 C21.2 C22.2 C23.2 C24.2 C25.2 C26.2 C27.2 C71.1 C72.1 C73.1 U4.AD11 U4.AE22 U4.AE30 U4.AG16 U4.AG28 U4.AH13 U4.AH15 U4.AH23 U4.AH25 U4.AH27 U4.AH29 U4.AJ28 U4.AL28 U4.AM9 U4.AM11 U4.AN28 U4.AP27 U4.AP29 U4.AU10 U4.J28 U4.K25 U4.K27 U4.M13 U4.M15 U4.M17 U4.N14 U4.T13 U4.T15 U4.T23 U4.T31 U4.Y19 U4.Y21 | length 636.7
  Top Layer w2: U4.AM9@3653.58,3020.44 v1(3664.72,3009.3) ; U4.AU10@3664.72,2964.73 v1(3664.72,2970.67) ; v1(3664.72,3031.58) U4.AM11@3675.86,3020.44 ; v1(3664.72,3120.71) U4.AD11@3675.86,3109.57 ; v1(3687.01,3076.14) U4.AH13@3698.15,3065 ; v1(3687.01,3209.84) U4.T13@3698.15,3198.7 ; v1(3687.01,3254.41) U4.M13@3698.15,3243.27 ; v1(3709.29,3076.14) U4.AH15@3720.43,3065 ; v1(3709.29,3209.84) U4.T15@3720.43,3198.7 ; v1(3709.29,3226.19) U4.N14@3709.29,3232.13 ; v1(3709.29,3254.41) U4.M15@3720.43,3243.27 ; U4.AG16@3731.57,3076.15 v1(3731.57,3082.09) ; v1(3731.58,3254.41) U4.M17@3742.72,3243.27 ; v1(3753.86,3165.28) U4.Y19@3765,3154.14 ; v1(3776.14,3165.28) U4.Y21@3787.28,3154.14 ; U4.AE22@3798.42,3098.43 v1(3798.42,3104.37) ; v1(3798.43,3076.14) U4.AH23@3809.57,3065 ; v1(3809.57,3192.76) U4.T23@3809.57,3198.7 ; v1(3820.71,3076.14) U4.AH25@3831.85,3065 ; U4.K25@3831.85,3265.56 v1(3842.99,3254.42) ; v1(3842.99,3009.29) U4.AP27@3854.13,2998.15 ; v1(3842.99,3076.14) U4.AH27@3854.13,3065 ; U4.K27@3854.13,3265.56 v1(3865.27,3254.42) ; U4.AN28@3865.27,3009.3 v1(3865.27,3015.24) ; U4.AL28@3865.27,3031.58 v1(3865.27,3037.52) ; U4.AJ28@3865.27,3053.86 v1(3865.27,3059.8) ; U4.AG28@3865.27,3076.15 v1(3865.27,3082.09) ; v1(3865.27,3270.76) U4.J28@3865.27,3276.7 ; U4.AP29@3876.42,2998.15 v1(3887.56,3009.29) ; U4.AH29@3876.42,3065 v1(3887.56,3076.14) ; U4.AE30@3887.56,3098.43 v1(3887.56,3104.37) ; v1(3898.7,3192.76) U4.T31@3898.7,3198.7 ; v1(4030.98,3533.31) C71.1@4030.98,3555 ; v1(4250,3538.31) C72.1@4250,3560 ; v1(4475,3538.31) C73.1@4475,3560 ; v1(4931.19,2645) C25.2@4945,2645 ; v1(4931.37,2805) C24.2@4945.18,2805 ; v1(4952.56,2958.31) 4952.56,2959.11 C23.2@4952.56,2980 ; v1(4952.56,3138.39) 4952.56,3139.18 C22.2@4952.56,3160.08 ; v1(5001.19,2180) C27.2@5015,2180 ; v1(5006.19,2445) C26.2@5020,2445 ; C18.2@5260,3426.57 5280.89,3426.57 v1(5281.69,3426.57) ; v1(5295,3118.31) 5295,3119.11 C19.2@5295,3140 ; v1(5307.56,2878.31) 5307.56,2879.11 C20.2@5307.56,2900 ; v1(5317.56,2703.31) 5317.56,2704.11 C21.2@5317.56,2725
VREG_L5: C50.1 C51.2 C52.2 C53.2 C54.2 C55.2 C56.2 C57.2 C65.2 R13.1 R15.1 R17.1 R18.1 R19.1 R20.1 U4.AA32 U4.AB35 U4.AC34 U4.AF33 U4.AG32 U4.AK9 U4.AP33 U4.AT7 U4.AT11 U4.AT33 U4.AU8 U4.AU30 U4.AU34 U4.F31 U4.H17 U4.J8 U4.L34 U4.V7 | length 510.7
  Top Layer w2: v1(2917.44,2938.31) C65.2@2917.44,2960 ; v1(3155,2590.87) R13.1@3155,2612.56 ; v1(3595,2590.87) R15.1@3595,2612.56 ; U4.AT7@3631.3,2975.87 v1(3631.3,2981.81) ; v1(3631.3,3170.48) U4.V7@3631.3,3176.42 ; U4.AU8@3642.44,2964.73 v1(3642.44,2970.67) ; U4.J8@3642.44,3276.7 v1(3653.58,3287.84) ; U4.AK9@3653.58,3042.72 v1(3664.72,3053.86) ; U4.AT11@3675.86,2975.87 v1(3675.86,2981.81) ; v1(3742.72,3281.9) U4.H17@3742.72,3287.84 ; v1(3815,2590.87) R17.1@3815,2612.56 ; U4.AU30@3887.56,2964.73 v1(3887.56,2970.67) ; v1(3898.7,3304.18) U4.F31@3898.7,3310.12 ; v1(3909.84,2987.01) U4.AT33@3920.98,2975.87 ; v1(3909.84,3009.29) U4.AP33@3920.98,2998.15 ; U4.AG32@3909.84,3076.15 v1(3920.98,3065.01) ; v1(3909.84,3098.43) U4.AF33@3920.98,3087.29 ; U4.AA32@3909.84,3143 v1(3909.84,3148.94) ; v1(3920.98,3131.85) U4.AC34@3932.12,3120.71 ; U4.AU34@3932.12,2964.73 v1(3932.12,2970.67) ; v1(3932.12,3248.47) U4.L34@3932.12,3254.41 ; U4.AB35@3943.27,3131.85 v1(3954.41,3120.71) ; v1(4020,1931.51) C57.2@4020,1953.19 ; v1(4095,2591.63) R18.1@4095,2613.31 ; v1(4250,1940.75) C56.2@4250,1962.44 ; v1(4255,2590.87) R19.1@4255,2612.56 ; v1(4475,1890.75) C55.2@4475,1912.44 ; v1(4490,2590.87) R20.1@4490,2612.56 ; v1(4735,1875.75) C54.2@4735,1897.44 ; v1(4985,1851.63) C53.2@4985,1873.31 ; v1(5260,1812.79) C52.2@5260,1834.47 ; v1(5382.56,2013.31) C50.1@5382.56,2035 ; v1(5470,1812.79) C51.2@5470,1834.47
VREG_L6: C70.1 R28.2 U4.AH5 | length 264.9
  Top Layer w2: C70.1@3420,3171.07 C70.1@3430.62,3181.69 ; R28.2@3490,3181.69 R28.2@3491.69,3180 ; U4.AH5@3609.01,3065 v1(3609.01,3070.94)
  Top Layer w3.5: C70.1@3430.62,3181.69 R28.2@3490,3181.69 ; R28.2@3491.69,3180 v1(3525,3180)
  Layer 2 w2: 3550,3126.65 3558.51,3126.65 3609.01,3076.15 v1(3609.01,3070.94)
  Layer 2 w3.5: v1(3525,3180) 3525,3151.65 3550,3126.65
VREG_L7: C66.1 C76.1 C77.1 C78.1 C79.1 U4.AD33 U4.AN14 U4.AP23 U4.AR18 U4.AR20 U4.W24 | length 4510.1
  Top Layer w2: C78.1@2725,3460 v1(2725,3481.69) ; C79.1@2782.56,3555 C79.1@2795,3567.44 v1(2795,3545.75) ; v1(3360,3538.31) C76.1@3360,3560 ; v1(3595,3540.75) C77.1@3595,3562.44 ; U4.AN14@3709.29,3009.3 v1(3709.29,3015.24) ; U4.AR18@3753.86,2987.01 v1(3753.86,2992.95) ; U4.AR20@3776.14,2987.01 v1(3787.28,2998.15) ; v1(3798.43,3009.29) U4.AP23@3809.57,2998.15 ; U4.W24@3820.71,3165.28 v1(3820.71,3171.22) ; U4.AD33@3920.98,3109.57 v1(3932.12,3098.43) ; v1(4648.31,3304.88) C66.1@4670,3304.88
  Top Layer w3.5: v1(2725,3481.69) 2745,3501.69 2745,3540.75 2750,3545.75 2760.75,3545.75 2770,3555 C79.1@2782.56,3555
  Layer 2 w2: 2828.83,3528.31 2830,3529.49 ; 3652.41,3659.75 3653.58,3658.58 ; 3663.41,3385.87 3664.72,3385.87 3668.83,3381.77 3668.83,3325.32 3692.44,3301.71 3692.44,3290.44 3687.83,3285.83 3686.17,3285.83 3670.29,3301.71 3655,3301.71 3655,3295 3665,3285 3670,3285 3692.44,3262.56 3707.75,3262.56 3707.81,3262.62 3723.12,3262.62 3725.75,3260 3729.68,3260 3744.68,3275 3764.17,3275 3812.57,3226.6 3812.57,3185.52 3778.34,3185.52 3774.45,3181.62 3658.31,3181.62 3646.55,3193.39 3640,3193.39 3634.17,3187.56 3634.17,3184.51 3645.44,3173.25 3645.44,3170.2 3663.7,3151.94 3848.18,3151.94 3886.54,3113.58 3886.54,3120.67 3887.71,3121.84 3898.21,3121.84 3918.62,3101.43 ; v1(3709.29,3015.24) 3734.76,3015.24 3745.91,3004.09 3768.83,3004.09 3770,3002.91 3770,2994.12 3768.83,2992.95 3759.06,2992.95 ; v1(3753.86,2992.95) 3759.06,2992.95 ; v1(3820.71,3171.22) 3828.85,3163.08 3846.89,3163.08 3875.18,3134.79 3892.68,3134.79 3908.3,3119.17 3919.69,3119.17 3932.12,3106.74 v1(3932.12,3098.43) ; 4015.91,3135 3995.82,3135 3987.83,3142.99 3961.06,3142.99 3953.07,3135 3938.96,3135 3936.17,3137.79 3935,3136.61 3935,3131.65 3940,3126.65 3940,3106.31 v1(3932.12,3098.43) ; 3759.06,2992.95 3764.17,2987.84 3770.57,2987.84 3780.88,2998.15 v1(3787.28,2998.15) 3805.57,2998.15 3806.74,2999.32 3806.74,3000.98 v1(3798.43,3009.29) 3779.14,3028.58 3761.1,3028.58 3729.68,3060 3616.17,3060 3615,3061.17 3615,3085 3634.17,3104.17 3638.39,3104.17 3641.2,3101.37 3663.41,3101.37 3663.48,3101.43 3710.53,3101.43 3710.6,3101.37 3742.68,3101.37 3742.75,3101.43 3774.83,3101.43 3774.9,3101.37 3810.81,3101.37 3810.88,3101.43 3866.52,3101.43 3866.59,3101.37 3892.69,3101.37 3892.75,3101.43 3918.62,3101.43 ; 3918.62,3101.43 3921.62,3098.43 v1(3932.12,3098.43)
  Layer 2 w3.5: v1(2795,3545.75) 2812.44,3528.31 2828.83,3528.31 ; 2830,3529.49 2830,3645 2845,3660 3300,3660 3310,3650 3310,3545.75 3317.44,3538.31 v1(3360,3538.31) 3373.31,3525 3390,3525 3400,3535 3400,3655 3404.75,3659.75 3652.41,3659.75 ; 3653.58,3658.58 3653.58,3550 3644.33,3540.75 v1(3595,3540.75) 3663.41,3472.34 3663.41,3385.87 ; 4015.91,3135 4019.06,3131.85 4115,3131.85 4120.94,3137.79 4181.37,3137.79 4264.57,3220.99 4296.83,3220.99 4380.72,3304.88 v1(4648.31,3304.88)
VREG_S1: C28.2 C29.2 C30.2 C31.2 C32.2 C33.2 C34.2 C35.2 C36.2 C37.2 R24.2 U4.AD13 U4.AD15 U4.AD17 U4.AD25 U4.AD29 U4.AF31 U4.AH11 U4.AH17 U4.AH19 U4.AH21 U4.AM17 U4.AM19 U4.AR10 U4.M9 U4.M11 U4.M21 U4.T9 U4.T11 U4.T21 U4.U8 U4.U22 U4.U24 U4.Y9 U4.Y11 U4.Y13 U4.Y15 U4.Y17 | length 593.1
  Top Layer w2: v1(2814.41,2289.1) C37.2@2814.41,2310.79 ; v1(3044.41,2289.1) C36.2@3044.41,2310.79 ; v1(3279.41,2297.88) C35.2@3279.41,2311.69 ; v1(3504.41,2289.1) C34.2@3504.41,2310.79 ; v1(3642.44,3181.62) U4.U8@3642.44,3187.56 ; U4.Y9@3653.58,3154.14 v1(3664.72,3143) ; U4.T9@3653.58,3198.7 v1(3664.72,3187.56) ; U4.M9@3653.58,3243.27 v1(3664.72,3232.13) ; U4.AR10@3664.72,2987.01 v1(3675.86,2998.15) ; v1(3664.72,3076.14) U4.AH11@3675.86,3065 ; v1(3664.72,3165.28) U4.Y11@3675.86,3154.14 ; v1(3664.72,3209.84) U4.T11@3675.86,3198.7 ; v1(3664.72,3254.41) U4.M11@3675.86,3243.27 ; v1(3687.01,3120.71) U4.AD13@3698.15,3109.57 ; v1(3687.01,3165.28) U4.Y13@3698.15,3154.14 ; v1(3709.29,3120.71) U4.AD15@3720.43,3109.57 ; v1(3709.29,3165.28) U4.Y15@3720.43,3154.14 ; v1(3731.58,3031.58) U4.AM17@3742.72,3020.44 ; v1(3731.58,3120.71) U4.AD17@3742.72,3109.57 ; v1(3734.41,2289.1) C33.2@3734.41,2310.79 ; U4.AH17@3742.72,3065 v1(3753.86,3053.86) ; U4.Y17@3742.72,3154.14 v1(3753.86,3143) ; v1(3753.86,3031.58) U4.AM19@3765,3020.44 ; U4.AH19@3765,3065 v1(3776.14,3053.86) ; v1(3776.14,3209.84) U4.T21@3787.28,3198.7 ; v1(3776.14,3254.41) U4.M21@3787.28,3243.27 ; U4.AH21@3787.28,3065 v1(3798.42,3053.86) ; v1(3798.42,3181.62) U4.U22@3798.42,3187.56 ; v1(3820.71,3120.71) U4.AD25@3831.85,3109.57 ; v1(3820.71,3181.62) U4.U24@3820.71,3187.56 ; v1(3865.28,3120.71) U4.AD29@3876.42,3109.57 ; U4.AF31@3898.7,3087.29 v1(3898.7,3093.23) ; v1(3922.84,2160) R24.2@3936.65,2160 ; v1(3964.41,2289.1) C32.2@3964.41,2310.79 ; v1(4074.53,2133.31) 4075.33,2133.31 C28.2@4088.35,2133.31 ; v1(4174.41,2289.1) C31.2@4174.41,2310.79 ; v1(4329.53,2145) C29.2@4343.35,2145 ; v1(4404.41,2289.1) C30.2@4404.41,2310.79
VREG_S2: C38.2 C39.2 C40.2 C41.2 C42.2 C43.2 C44.2 C45.2 C46.2 C47.2 C48.2 C49.2 R25.2 U4.AB25 U4.AB27 U4.AB29 U4.AB31 U4.K29 U4.K31 U4.K33 U4.M23 U4.M25 U4.M27 U4.M29 U4.M31 U4.M33 U4.P27 U4.P29 U4.P31 U4.P33 U4.T25 U4.T27 U4.T29 U4.T33 U4.V25 U4.V27 U4.V29 U4.V31 U4.V33 U4.Y25 U4.Y27 U4.Y29 U4.Y31 | length 481.6
  Top Layer w2: C45.2@2695,2425 2715.89,2425 v1(2716.69,2425) ; C46.2@2697.44,2212.56 2718.33,2212.56 v1(2719.13,2212.56) ; C41.2@2705,3227.56 2725.89,3227.56 v1(2726.69,3227.56) ; v1(2737.56,2558.31) 2737.56,2559.11 C44.2@2737.56,2580 ; v1(2737.56,2960.12) 2737.56,2960.91 C42.2@2737.56,2981.81 ; v1(2752.56,2738.31) 2752.56,2739.11 C43.2@2752.56,2760 ; v1(2780,2018.32) C47.2@2780,2040 ; C40.2@2870,3360 2870,3380.89 v1(2870,3381.69) ; v1(2955,2018.32) C48.2@2955,2040 ; v1(3165,2013.32) C49.2@3165,2035 ; v1(3355,2016.19) R25.2@3355,2030 ; v1(3575.59,1963.19) C39.2@3575.59,1984.88 ; v1(3787.28,1958.19) C38.2@3787.28,1979.88 ; v1(3798.43,3254.41) U4.M23@3809.57,3243.27 ; v1(3820.71,3254.41) U4.M25@3831.85,3243.27 ; U4.AB25@3831.85,3131.85 v1(3831.85,3137.79) ; U4.Y25@3831.85,3154.14 v1(3831.85,3160.08) ; v1(3831.85,3170.48) U4.V25@3831.85,3176.42 ; v1(3831.85,3192.76) U4.T25@3831.85,3198.7 ; v1(3842.99,3120.71) U4.AB27@3854.13,3131.85 ; U4.Y27@3854.13,3154.14 v1(3854.13,3160.08) ; v1(3854.13,3170.48) U4.V27@3854.13,3176.42 ; v1(3854.13,3192.76) U4.T27@3854.13,3198.7 ; v1(3854.13,3215.05) U4.P27@3854.13,3220.99 ; v1(3854.13,3237.33) U4.M27@3854.13,3243.27 ; U4.AB29@3876.42,3131.85 v1(3876.42,3137.79) ; U4.Y29@3876.42,3154.14 v1(3876.42,3160.08) ; v1(3876.42,3170.48) U4.V29@3876.42,3176.42 ; v1(3876.42,3192.76) U4.T29@3876.42,3198.7 ; v1(3876.42,3215.05) U4.P29@3876.42,3220.99 ; v1(3876.42,3237.33) U4.M29@3876.42,3243.27 ; v1(3876.42,3259.62) U4.K29@3876.42,3265.56 ; U4.AB31@3898.7,3131.85 v1(3898.7,3137.79) ; U4.Y31@3898.7,3154.14 v1(3898.7,3160.08) ; v1(3898.7,3170.48) U4.V31@3898.7,3176.42 ; v1(3898.7,3215.05) U4.P31@3898.7,3220.99 ; v1(3898.7,3237.33) U4.M31@3898.7,3243.27 ; v1(3898.7,3259.62) U4.K31@3898.7,3265.56 ; v1(3920.98,3170.48) U4.V33@3920.98,3176.42 ; v1(3920.98,3192.76) U4.T33@3920.98,3198.7 ; v1(3920.98,3215.05) U4.P33@3920.98,3220.99 ; v1(3920.98,3237.33) U4.M33@3920.98,3243.27 ; v1(3920.98,3259.62) U4.K33@3920.98,3265.56
pads on no net: C15.1 C16.1 C17.1 R23.1 R26.1 U4.A2 U4.A38 U4.A40 U4.AA34 U4.AA36 U4.AA38 U4.AA40 U4.AB11 U4.AB19 U4.AB23 U4.AC6 U4.AD1 U4.AD3 U4.AD5 U4.AD23 U4.AD27 U4.AD31 U4.AJ6 U4.AK3 U4.AK5 U4.AK25 U4.AK27 U4.AL4 U4.AL6 U4.AL38 U4.AM5 U4.AM7 U4.AM27 U4.AN2 U4.AN4 U4.AN6 U4.AN8 U4.AN38 U4.AP3 U4.AP5 U4.AP7 U4.AP25 U4.AP35 U4.AP37 U4.AR8 U4.AR38 U4.AT1 U4.AT3 U4.AT17 U4.AT19 U4.AT21 U4.AT25 U4.AT31 U4.AT35 U4.AT39 U4.AU2 U4.AU16 U4.AU18 U4.AU20 U4.AU24 U4.AU32 U4.AU36 U4.AU40 U4.AV21 U4.AV23 U4.AV25 U4.AV27 U4.AV29 U4.AV31 U4.AV39 U4.AW16 U4.AW18 U4.AW20 U4.AW22 U4.AW24 U4.AW26 U4.AW28 U4.AW30 U4.AW32 U4.AW36 U4.AW38 U4.AY15 U4.AY17 U4.AY25 U4.AY29 U4.AY33 U4.AY35 U4.AY39 U4.B1 U4.B39 U4.BA14 U4.BA16 U4.BA24 U4.BA30 U4.BA32 U4.BA36 U4.BB9 U4.BB29 U4.BB31 U4.BB33 U4.BB35 U4.BB37 U4.BC4 U4.BC6 U4.BC8 U4.BC30 U4.BC32 U4.BC34 U4.BD1 U4.BD9 U4.BD29 U4.BD33 U4.BD35 U4.BE2 U4.BE4 U4.BE6 U4.BE32 U4.BE34 U4.BE36 U4.BE38 U4.BE40 U4.C38 U4.C40 U4.D33 U4.D37 U4.D39 U4.E38 U4.E40 U4.F3 U4.F15 U4.F17 U4.F21 U4.F39 U4.G22 U4.G26 U4.G34 U4.G40 U4.H7 U4.H11 U4.H13 U4.H15 U4.H19 U4.H23 U4.H25 U4.H27 U4.H29 U4.H31 U4.H39 U4.J34 U4.J40 U4.K35 U4.K39 U4.L36 U4.L38 U4.L40 U4.M19 U4.P19 U4.P23 U4.P25 U4.Y35 U4.Y37 U4.Y39
copper on no net: | length 6.9
  Top Layer w2: 3909.84,2868.66 3909.84,2875.59

## Polygon pours and split planes (outlines as drawn)
GND on Internal Plane 1 (split plane): 6979.9,1020.1 1020.1,1020.1 1020.1,4979.9 6979.9,4979.9
VREG_S1 on Internal Plane 5 (split plane): 6979.9,1020.1 1020.1,1020.1 1020.1,4979.9 6979.9,4979.9
VREG_L5 on Internal Plane 3 (split plane): 6979.9,1020.1 1020.1,1020.1 1020.1,4979.9 6979.9,4979.9
VREG_L3 on Internal Plane 4 (split plane): 6979.9,1020.1 1020.1,1020.1 1020.1,4979.9 6979.9,4979.9
VREG_S2 on Internal Plane 6 (split plane): 6979.9,1020.1 1020.1,1020.1 1020.1,4979.9 6979.9,4979.9
VREG_L2 on Internal Plane 2 (split plane): 6979.9,1020.1 1020.1,1020.1 1020.1,4979.9 6979.9,4979.9